# EAGLE board astrotracker (EAGLE 7.7.0)
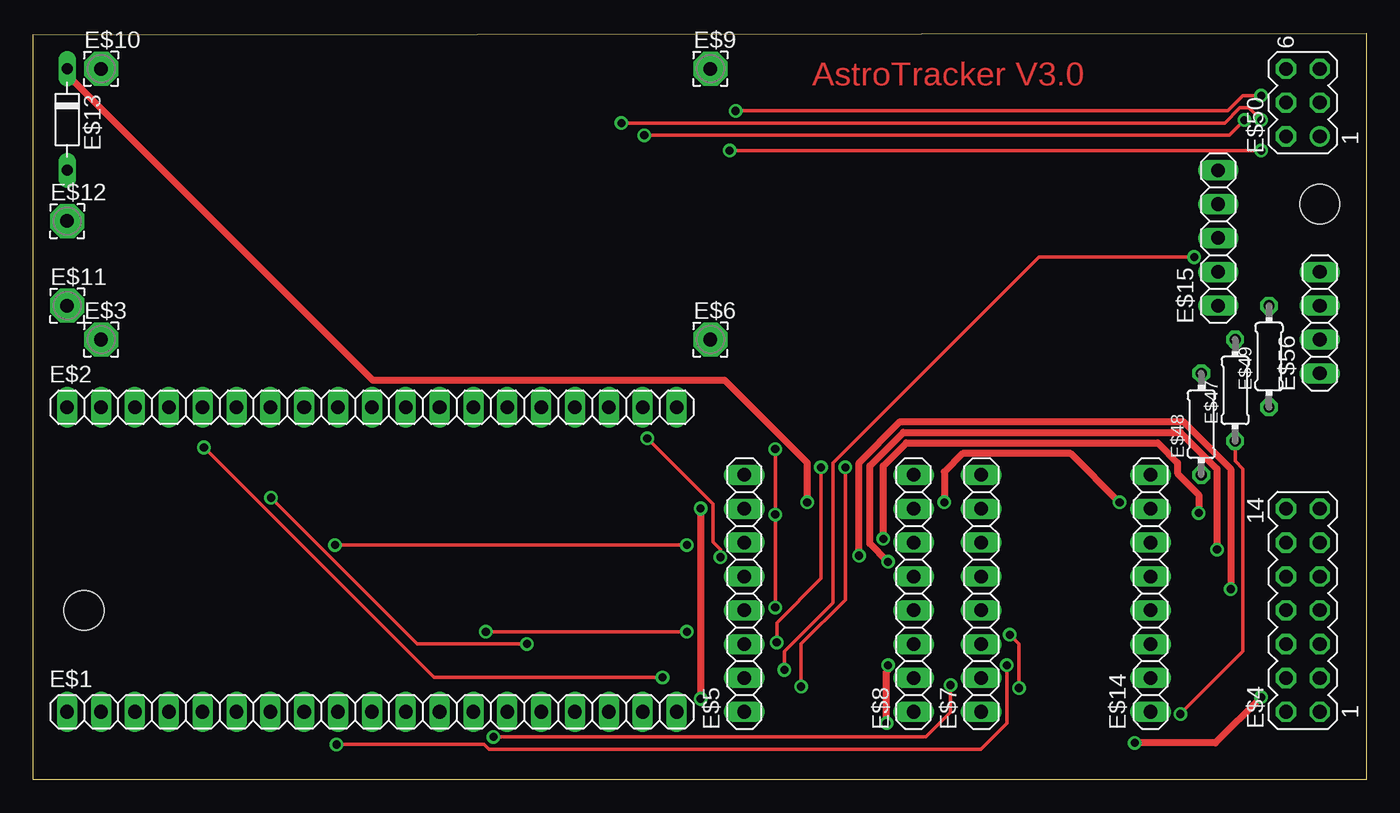
[diagram p0: board, top side]
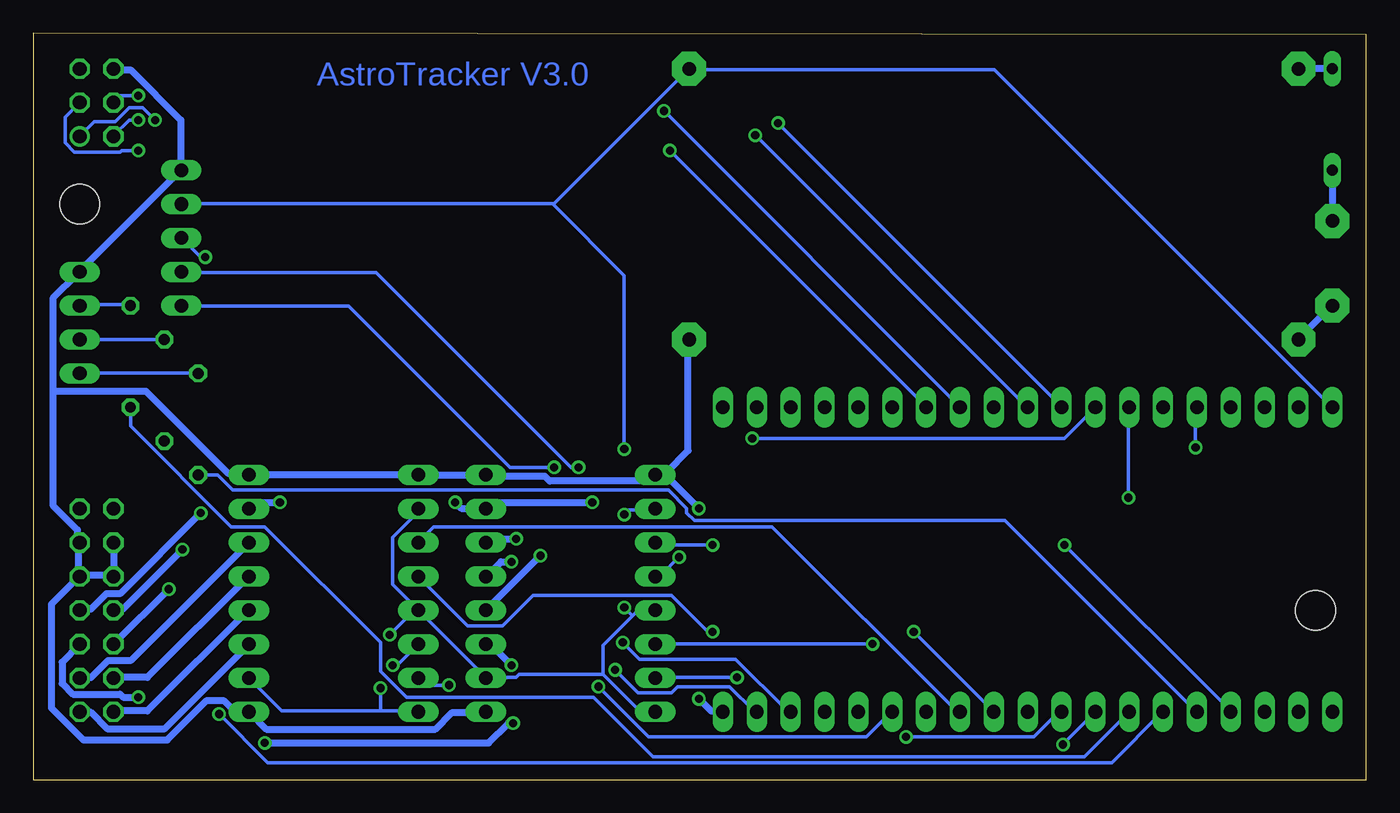
[diagram p1: board, bottom side, seen from below]

Size 100 x 56 mm. Coordinates in mm from the lower left corner, seen from the top.
Outline: 0,0 0,55.88 100,56 100,0 0,0
Copper layers (1*16): Top 0.035mm / dielectric 1.5mm / Bottom 0.035mm
Design rules "default": minimum track width 10mil, minimum drill 24mil, track to track 8mil, track to pad 8mil, pad to pad 8mil, via to via 8mil, smd to smd 8mil, copper to edge 40mil, drill to drill 8mil, minimum pad ring 10mil, minimum via ring 8mil, stop-mask expansion 4mil, vias tented up to drill 0mil, thermal gap 10mil
Net classes: 0 default: width 0.254 mm; 1 12V: width 0.508 mm; 2 GND: width 0.508 mm; 3 12Vmain: width 0.508 mm
Holes 3 mm at 96.52,43.18 3.81,12.7
tRestrict: area 1.3,26.7 to 49.5,29.2; area 1.3,3.8 to 49.5,6.3; area 52.1,3.8 to 54.6,24.1; area 64.8,3.8 to 67.3,24.1; area 69.8,3.8 to 72.4,24.1; area 82.5,3.8 to 85.1,24.1; area 92.7,3.8 to 97.8,21.6; area 95.2,29.2 to 97.8,39.4; area 92.7,47 to 97.8,54.6; area 87.6,34.3 to 90.2,47; area 3.8,31.7 to 6.3,34.3; area 1.3,34.3 to 3.8,36.8; 4 more areas
vRestrict: area 53.3,25.4 to 83.8,55.9

## Footprints (pad centres in the part's own frame; a part is rotated, then mirrored left to right if it is on the bottom)
1X19 = drill 1.016 long: 1 -22.86,0; 2 -20.32,0; 3 -17.78,0; 4 -15.24,0; 5 -12.7,0; 6 -10.16,0; 7 -7.62,0; 8 -5.08,0; 9 -2.54,0; 10 0,0; 11 2.54,0; 12 5.08,0; 13 7.62,0; 14 10.16,0; 15 12.7,0; 16 15.24,0; 17 17.78,0; 18 20.32,0; 19 22.86,0
2,54/1,0 = drill 1.016 pad 2.54 octagon: 1 0,0
MA07-2 = drill 1.016 octagon: 1 -7.62,-1.27; 2 -7.62,1.27; 3 -5.08,-1.27; 4 -5.08,1.27; 5 -2.54,-1.27; 6 -2.54,1.27; 7 0,-1.27; 8 0,1.27; 9 2.54,-1.27; 10 2.54,1.27; 11 5.08,-1.27; 12 5.08,1.27; 13 7.62,-1.27; 14 7.62,1.27
1X08 = drill 1.016 long: 1 -8.89,0; 2 -6.35,0; 3 -3.81,0; 4 -1.27,0; 5 1.27,0; 6 3.81,0; 7 6.35,0; 8 8.89,0
D-7.5 = drill 0.813 long: A 3.81,0; C -3.81,0
1X05 = drill 1.016 long: 1 -5.08,0; 2 -2.54,0; 3 0,0; 4 2.54,0; 5 5.08,0
0204/7 = drill 0.813 octagon: 1 -3.81,0; 2 3.81,0
MA03-2 = drill 1.016: 1 -2.54,-1.27 | drill 1.016 octagon: 2 -2.54,1.27; 3 0,-1.27; 4 0,1.27; 5 2.54,-1.27; 6 2.54,1.27
1X04 = drill 1.016 long: 1 -3.81,0; 2 -1.27,0; 3 1.27,0; 4 3.81,0

## Placement (x,y rotation side)
E$1  [1X19]  25.4,5.08 0 top
E$2  [1X19]  25.4,27.94 0 top
E$3  [2,54/1,0]  5.08,33.02 0 top
E$4  [MA07-2]  95.25,12.7 90 top
E$5  [1X08]  53.34,13.97 90 top
E$6  [2,54/1,0]  50.8,33.02 0 top
E$7  [1X08]  71.12,13.97 90 top
E$8  [1X08]  66.04,13.97 90 top
E$9  [2,54/1,0]  50.8,53.34 0 top
E$10  [2,54/1,0]  5.08,53.34 0 top
E$11  [2,54/1,0]  2.54,35.56 0 top
E$12  [2,54/1,0]  2.54,41.91 0 top
E$13  [D-7.5]  2.54,49.53 270 top
E$14  [1X08]  83.82,13.97 90 top
E$15  [1X05]  88.9,40.64 90 top
E$47  [0204/7]  90.17,29.21 90 top
E$48  [0204/7]  87.63,26.67 90 top
E$49  [0204/7]  92.71,31.75 90 top
E$50  [MA03-2]  95.25,50.8 90 top
E$56  [1X04]  96.52,34.29 90 top

## Library data of the parts
E$1 E$2 E$5 E$7 E$8 E$14 E$15 E$56 = pinhead
E$3 E$6 E$9-E$12 = wirepad
E$4 E$50 = con-lstb
E$13 = diode
E$47-E$49 = rcl

## Nets
S$1 [GND]: E$3.1 E$11.1
S$2 [12Vmain]: E$12.1 E$13.A
S$4: E$2.1 E$5.1 E$5.4 E$5.7 E$7.1 E$7.4 E$7.7 E$8.2 E$9.1 E$14.2 E$15.4
S$5 [GND]: E$1.19 E$4.9 E$4.10 E$4.11 E$4.12 E$5.8 E$6.1 E$7.8 E$8.1 E$8.8 E$14.1 E$14.8 E$15.5 E$50.6 E$56.4
S$7: E$49.2 E$56.3
S$8: E$47.2 E$56.2
S$9: E$48.2 E$56.1
S$11: E$2.5 E$5.2
S$12: E$2.7 E$5.3
S$13: E$2.8 E$5.5
S$14: E$1.4 E$5.6
S$15: E$1.8 E$7.3
S$16: E$1.9 E$7.2
S$17: E$1.11 E$7.5
S$18: E$1.12 E$7.6
S$19: E$1.14 E$15.1
S$20: E$1.17 E$15.2
S$21: E$1.18 E$15.3
S$22: E$1.5 E$48.1
S$23: E$1.6 E$47.1
S$24: E$1.7 E$49.1
S$25 [12V]: E$4.5 E$8.3
S$27 [12V]: E$4.6 E$8.4
S$28 [12V]: E$4.8 E$8.5
S$29 [12V]: E$4.7 E$8.6
S$30 [12V]: E$4.1 E$14.3
S$31 [12V]: E$4.2 E$14.4
S$32 [12V]: E$4.4 E$14.5
S$33 [12V]: E$4.3 E$14.6
S$34 [12V]: E$8.7 E$10.1 E$13.C E$14.7
S$35: E$2.10 E$50.1
S$36: E$2.9 E$50.2
S$37: E$2.13 E$50.3
S$38: E$2.12 E$50.4

## Tracks (layer width: path | path; a pad name or v marks a point on that pad's centre or on a via)
S$1
  Bottom 0.508: E$11.1 2.63,35.55 5.14,33.03 E$3.1
S$2
  Bottom 0.508: E$13.A 2.52,45.72 2.52,41.95 E$12.1
S$4  (via drill 0.61)
  Top 0.254: v55.66,12.92 v55.66,19.89 v55.66,24.8 | v73.95,6.86 73.95,10.17 v73.27,10.86
  Bottom 0.254: 57.26,7.89 54.52,5.14 53.38,5.14 E$5.1 | 57.26,7.89 57.26,10.06 55.03,12.29 | 55.03,12.29 54.63,12.69 53.38,12.69 E$5.4 | v55.66,19.89 55.32,20.23 53.38,20.23 E$5.7 | 55.03,12.29 v55.66,12.92 | 73.95,5.14 81.38,5.14 83.78,7.54 E$14.2 | 73.95,5.14 71.21,5.14 E$7.1 | E$7.4 71.09,12.69 66.06,7.66 E$8.2 65.95,7.66 63.78,7.66 63.55,7.89 57.26,7.89 | E$7.7 71.21,20.23 71.21,20 73.04,18.17 73.04,14.63 71.21,12.8 E$7.4 | v73.95,6.86 73.95,5.14 | v73.27,10.86 71.32,12.8 E$7.4 | E$2.1 2.63,28 27.89,53.26 50.75,53.26 E$9.1 50.86,53.26 60.92,43.2 | 60.92,43.2 88.81,43.2 E$15.4 | v55.66,24.8 55.66,37.83 60.92,43.09 60.92,43.2
S$5  (via drill 0.61)
  Top 0.508: v50.06,20.34 v50.06,6.06
  Bottom 0.508: v50.06,6.06 49.15,5.14 48.35,5.14 E$1.19 | v50.06,20.34 52.58,22.86 E$5.8 | E$6.1 50.86,32.92 50.86,24.69 52.46,23.09 E$5.8 | E$5.8 53.49,22.75 53.84,22.4 61.27,22.4 61.61,22.75 65.84,22.75 E$8.8 E$7.8 E$14.8 84.01,22.97 85.38,22.97 91.55,29.15 98.53,29.15 | E$8.1 66.06,5.03 68.58,5.03 69.84,3.77 82.53,3.77 83.78,5.03 E$14.1 84.01,5.14 84.92,5.14 85.72,5.94 86.98,5.94 89.95,2.97 96.24,2.97 98.64,5.37 98.64,13.14 96.7,15.09 E$4.9 | E$4.12 93.95,17.72 93.95,15.32 E$4.10 94.18,15.32 96.47,15.32 E$4.9 | E$4.9 96.58,15.54 96.58,17.72 E$4.11 96.7,17.95 96.7,18.75 98.53,20.57 98.53,29.15 | E$50.6 93.95,53.26 92.7,53.26 88.92,49.49 88.92,45.72 E$15.5 89.04,45.61 96.47,38.18 E$56.4 96.7,37.95 98.53,36.12 98.53,29.15
S$7
  Bottom 0.254: E$49.2 92.81,35.66 96.47,35.66 E$56.3
S$8
  Bottom 0.254: E$47.2 90.18,33.03 96.47,33.03 E$56.2
S$9
  Bottom 0.254: E$48.2 87.67,30.52 96.47,30.52 E$56.1
S$11  (via drill 0.61)
  Top 0.254: v47.21,7.66 30.06,7.66 v12.8,24.92
  Bottom 0.254: v47.21,7.66 53.26,7.66 E$5.2 | v12.8,24.92 12.8,27.89 E$2.5
S$12  (via drill 0.61)
  Top 0.254: v37.03,10.17 28.8,10.17 v17.83,21.14
  Bottom 0.254: v37.03,10.17 53.26,10.17 E$5.3 | v17.83,21.14 17.83,27.89 E$2.7
S$13  (via drill 0.61)
  Top 0.254: v51.55,16.69 51.55,17.26 50.98,17.83 50.98,20.69 v46.06,25.6
  Bottom 0.254: v51.55,16.69 52.92,15.32 53.26,15.32 E$5.5 | v46.06,25.6 22.63,25.6 20.34,27.89 E$2.8
S$14  (via drill 0.61)
  Top 0.254: v49.03,17.6 v22.63,17.6
  Bottom 0.254: v22.63,17.6 10.17,5.14 E$1.4 | v49.03,17.6 53.15,17.6 53.26,17.72 E$5.6
S$15  (via drill 0.61)
  Top 0.254: v22.75,2.63 33.83,2.63 34.18,2.29 71.09,2.29 73.04,4.23 v73.04,8.57
  Bottom 0.254: v22.75,2.63 20.34,5.03 E$1.8 | v73.04,8.57 72.69,8.57 71.21,10.06 E$7.3
S$16  (via drill 0.61)
  Top 0.254: v34.52,3.2 66.98,3.2 68.81,5.03 v68.81,7.09
  Bottom 0.254: v34.52,3.2 24.92,3.2 23.09,5.03 22.86,5.03 E$1.9 | v68.81,7.09 70.64,7.09 71.09,7.54 E$7.2
S$17  (via drill 0.61)
  Top 0.254: v49.03,11.09 v33.95,11.09
  Bottom 0.254: v33.95,11.09 E$1.11 | v49.03,11.09 49.38,11.09 52.12,13.83 62.52,13.83 64.81,11.54 67.44,11.54 71.09,15.2 E$7.5
S$18
  Bottom 0.254: E$1.12 30.52,5.14 30.75,5.14 44.58,18.97 69.95,18.97 71.09,17.83 E$7.6
S$19  (via drill 0.61)
  Top 0.254: v57.61,6.97 57.61,10.17 60.92,13.49 v60.92,23.43
  Bottom 0.254: v57.61,6.97 53.84,3.2 37.49,3.2 35.66,5.03 E$1.14 | v60.92,23.43 64.24,23.43 76.35,35.55 88.81,35.55 E$15.1
S$20  (via drill 0.61)
  Top 0.254: v55.78,10.29 55.78,11.77 59.09,15.09 v59.09,23.43
  Bottom 0.254: v55.78,10.29 54.52,9.03 47.32,9.03 43.43,5.14 43.2,5.14 E$1.17 | v59.09,23.43 59.66,23.43 74.3,38.06 88.81,38.06 E$15.2
S$21  (via drill 0.61)
  Top 0.254: v56.35,8.23 56.35,9.6 60.01,13.26 60.01,23.77 75.44,39.2 v87.1,39.2
  Bottom 0.254: v56.35,8.23 54.63,6.51 52.12,6.51 51.66,6.97 47.78,6.97 45.95,5.14 45.72,5.14 E$1.18 | v87.1,39.2 87.44,39.2 88.81,40.58 E$15.3
S$22
  Bottom 0.254: E$48.1 86.18,22.86 85.04,21.72 52.35,21.72 50.98,20.34 50.98,20 50.41,19.43 27.09,19.43 12.8,5.14 E$1.5
S$23  (via drill 0.61)
  Top 0.254: v86.07,4.92 90.75,9.6 90.75,23.32 90.18,23.89 90.18,25.38 E$47.1
  Bottom 0.254: v86.07,4.92 82.41,1.26 19.09,1.26 15.32,5.03 E$1.6
S$24
  Bottom 0.254: E$1.7 21.14,1.71 53.49,1.71 57.95,6.17 72.01,6.17 73.95,8.12 73.95,10.29 82.64,18.97 85.15,18.97 92.7,26.52 92.7,27.89 E$49.1
S$25  (via drill 0.61)
  Top 0.508: v64.12,8.57 64.12,8.23 64.01,8.12 v64.01,4.23 | v82.64,2.74 88.7,2.74 v92.13,6.17
  Bottom 0.508: v64.12,8.57 65.61,10.06 65.95,10.06 E$8.3 | v64.01,4.23 64.35,4.23 65.84,2.74 v82.64,2.74 | v92.13,6.17 93.27,6.17 93.5,6.4 97.04,6.4 97.84,7.2 97.84,8.8 96.58,10.06 E$4.5
S$27  (via drill 0.61)
  Top 0.508: v89.84,14.29 89.84,23.32 86.3,26.86 65.04,26.86 61.95,23.77 v61.95,16.8
  Bottom 0.508: v89.84,14.29 93.95,10.17 E$4.6 | v61.95,16.8 65.95,12.8 E$8.4
S$28  (via drill 0.61)
  Top 0.508: v88.81,17.26 88.81,23.32 86.07,26.06 65.27,26.06 62.75,23.55 62.75,17.72 v64.12,16.34
  Bottom 0.508: v88.81,17.26 93.27,12.8 93.95,12.8 E$4.8 | v64.12,16.34 64.92,16.34 65.95,15.32 E$8.5
S$29  (via drill 0.61)
  Top 0.508: v87.44,20 87.44,21.37 85.84,22.97 85.84,23.77 84.35,25.26 65.49,25.26 63.78,23.55 v63.78,18.06
  Bottom 0.508: v87.44,20 93.5,13.95 94.53,13.95 95.67,12.8 96.47,12.8 E$4.7 | v63.78,18.06 65.72,18.06 65.95,17.83 E$8.6
S$30
  Bottom 0.508: E$4.1 96.47,5.03 95.67,5.03 94.41,3.77 90.18,3.77 83.9,10.06 E$14.3
S$31
  Bottom 0.508: E$4.2 93.95,5.14 91.44,5.14 83.9,12.69 E$14.4
S$32
  Bottom 0.508: E$4.4 93.95,7.66 91.44,7.66 83.9,15.2 E$14.5
S$33
  Bottom 0.508: E$4.3 96.47,7.66 95.67,7.66 94.41,8.91 92.7,8.91 83.9,17.72 E$14.6
S$34  (via drill 0.61)
  Top 0.508: v68.35,20.8 68.35,23.09 69.72,24.46 77.84,24.46 v81.5,20.8 | v58.06,20.8 58.06,23.77 51.89,29.95 25.49,29.95 2.63,52.81 2.63,53.26 E$13.C
  Bottom 0.508: E$13.C 2.63,53.38 5.03,53.38 E$10.1 | v68.35,20.8 67.89,20.34 66.06,20.34 E$8.7 65.84,20.46 65.49,20.8 v58.06,20.8 | v81.5,20.8 83.33,20.8 83.78,20.34 E$14.7
S$35  (via drill 0.61)
  Top 0.254: v45.83,48.35 89.72,48.35 v90.87,49.49
  Bottom 0.254: v45.83,48.35 25.49,28 E$2.10 | v90.87,49.49 91.78,50.41 92.81,50.41 93.84,49.38 95.44,49.38 96.47,48.35 E$50.1
S$36  (via drill 0.61)
  Top 0.254: v44.12,49.26 89.38,49.26 90.53,50.41 91.21,50.41 v92.13,49.49
  Bottom 0.254: v44.12,49.26 22.86,28 E$2.9 | v92.13,49.49 92.81,49.49 93.95,48.35 E$50.2
S$37  (via drill 0.61)
  Top 0.254: v92.13,47.21 v52.23,47.21
  Bottom 0.254: v52.23,47.21 33.03,28 E$2.13 | v92.13,47.21 93.38,47.21 93.5,47.09 96.93,47.09 97.61,47.78 97.61,49.72 96.58,50.75 E$50.3
S$38  (via drill 0.61)
  Top 0.254: v52.69,50.18 89.61,50.18 90.75,51.32 v92.13,51.32
  Bottom 0.254: v52.69,50.18 30.52,28 E$2.12 | v92.13,51.32 93.5,51.32 93.95,50.86 E$50.4

## Text on the board
Top: AstroTracker V3.0
Bottom: AstroTracker V3.0